# Altium PCB FMC-320U-A2.PcbDoc
Units mm, origin at the board's own origin, x right, y up, seen from the top; angles counter-clockwise.
Board outline 96 x 84 mm, 2 copper layers (Top Layer, Bottom Layer), stack 1.672 mm thick; 84 components, 64 nets, 252 pads, 61 vias.
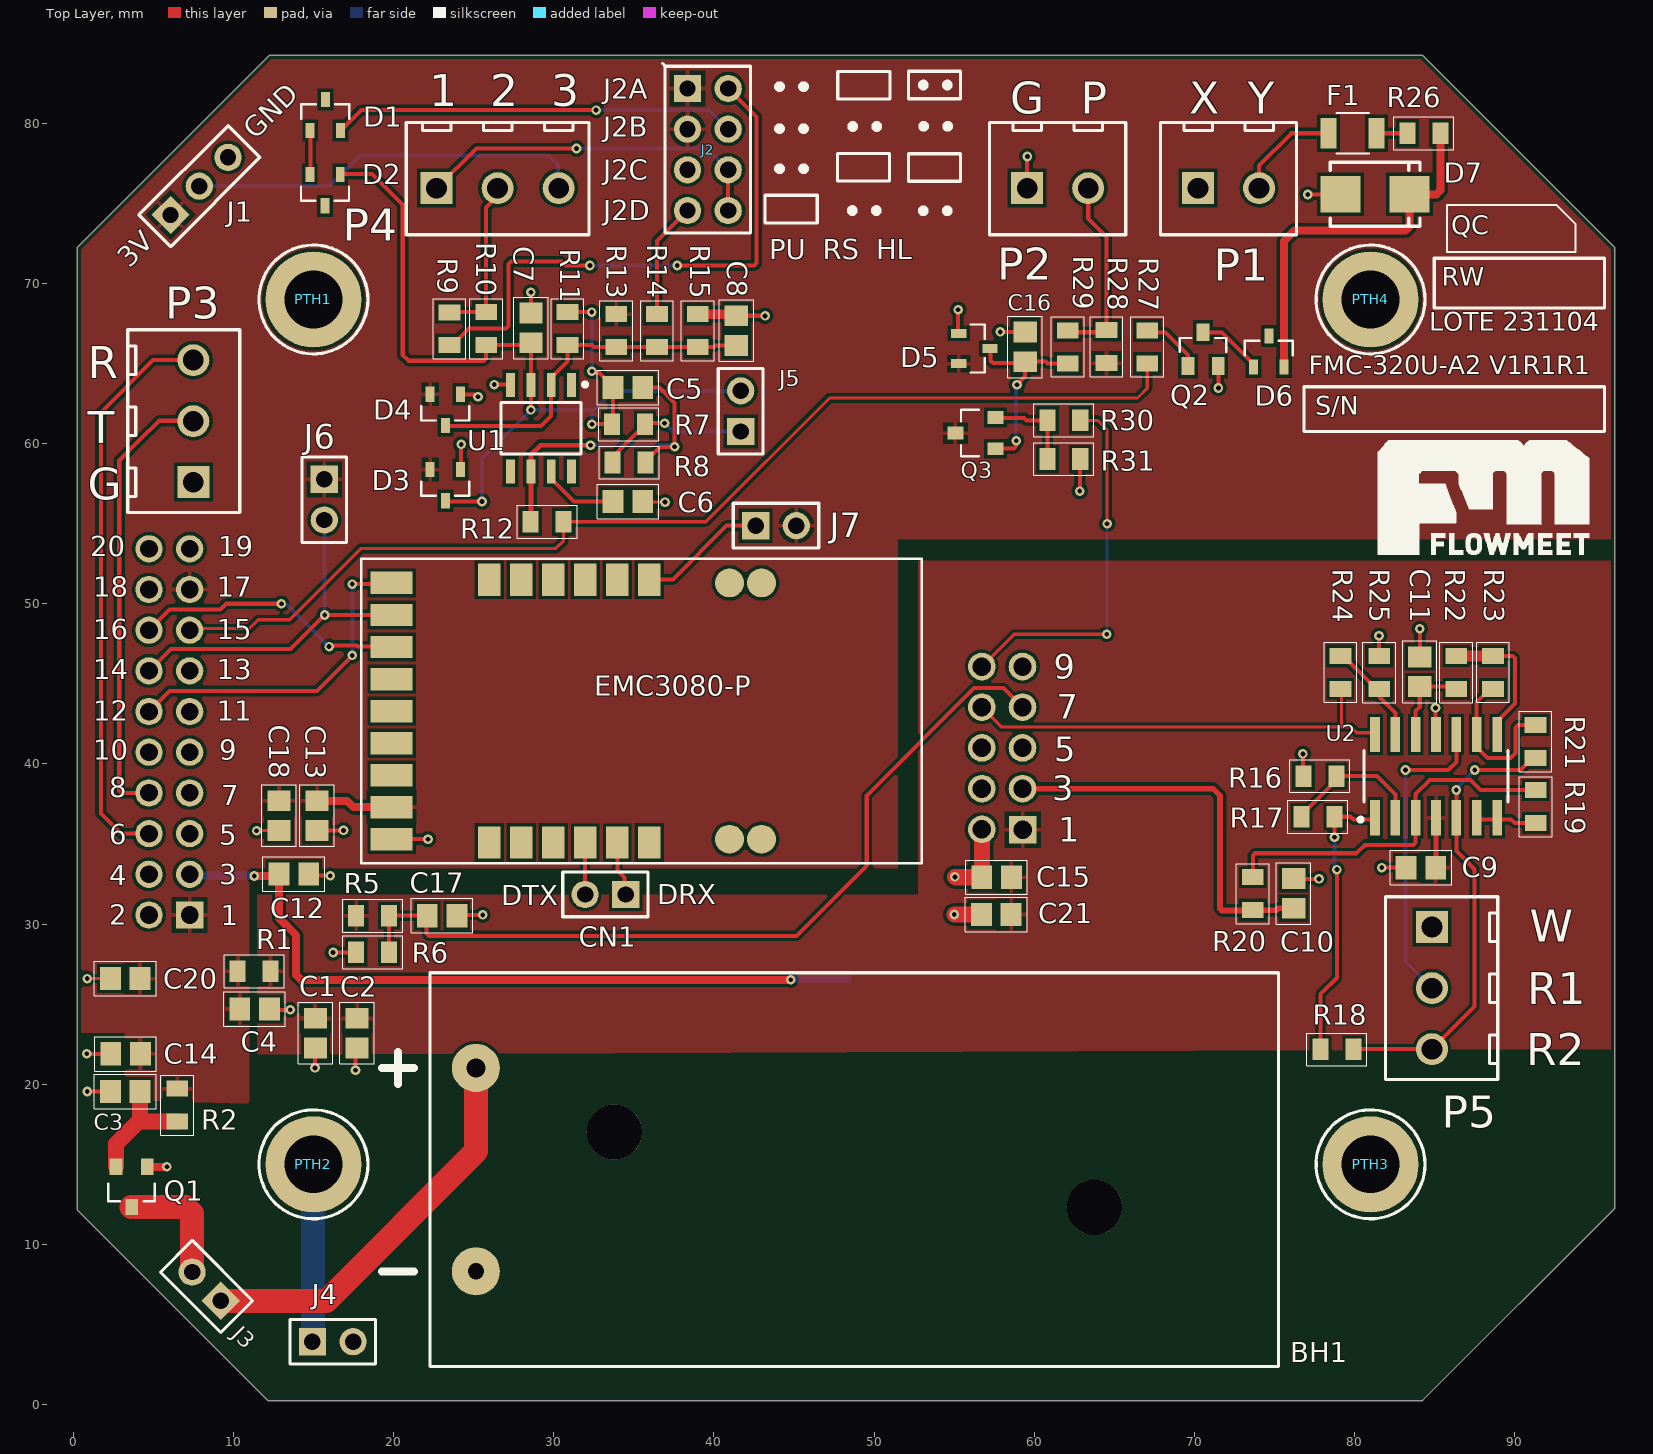
[diagram p0: Top Layer view]
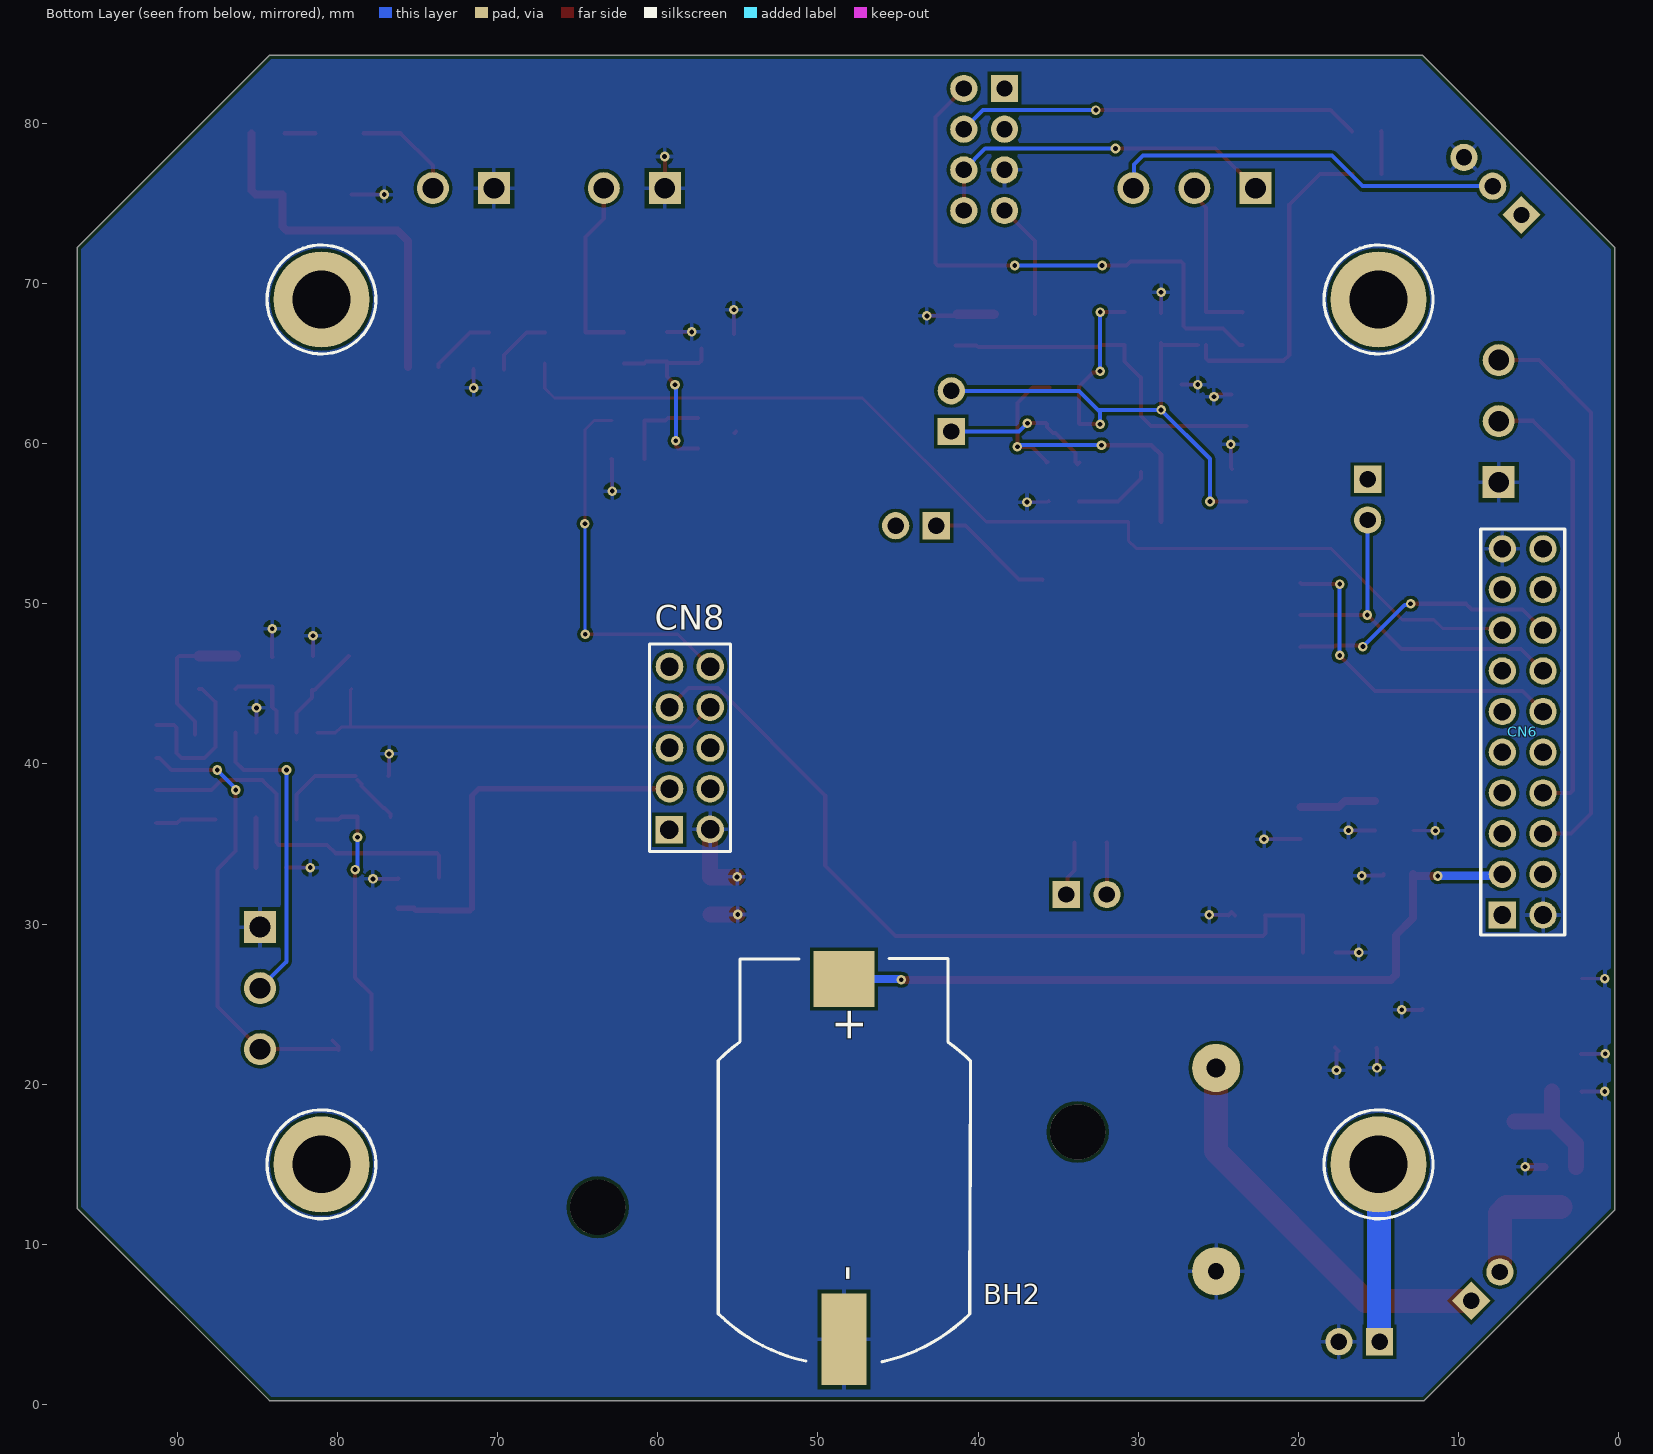
[diagram p1: Bottom Layer view, seen from below]
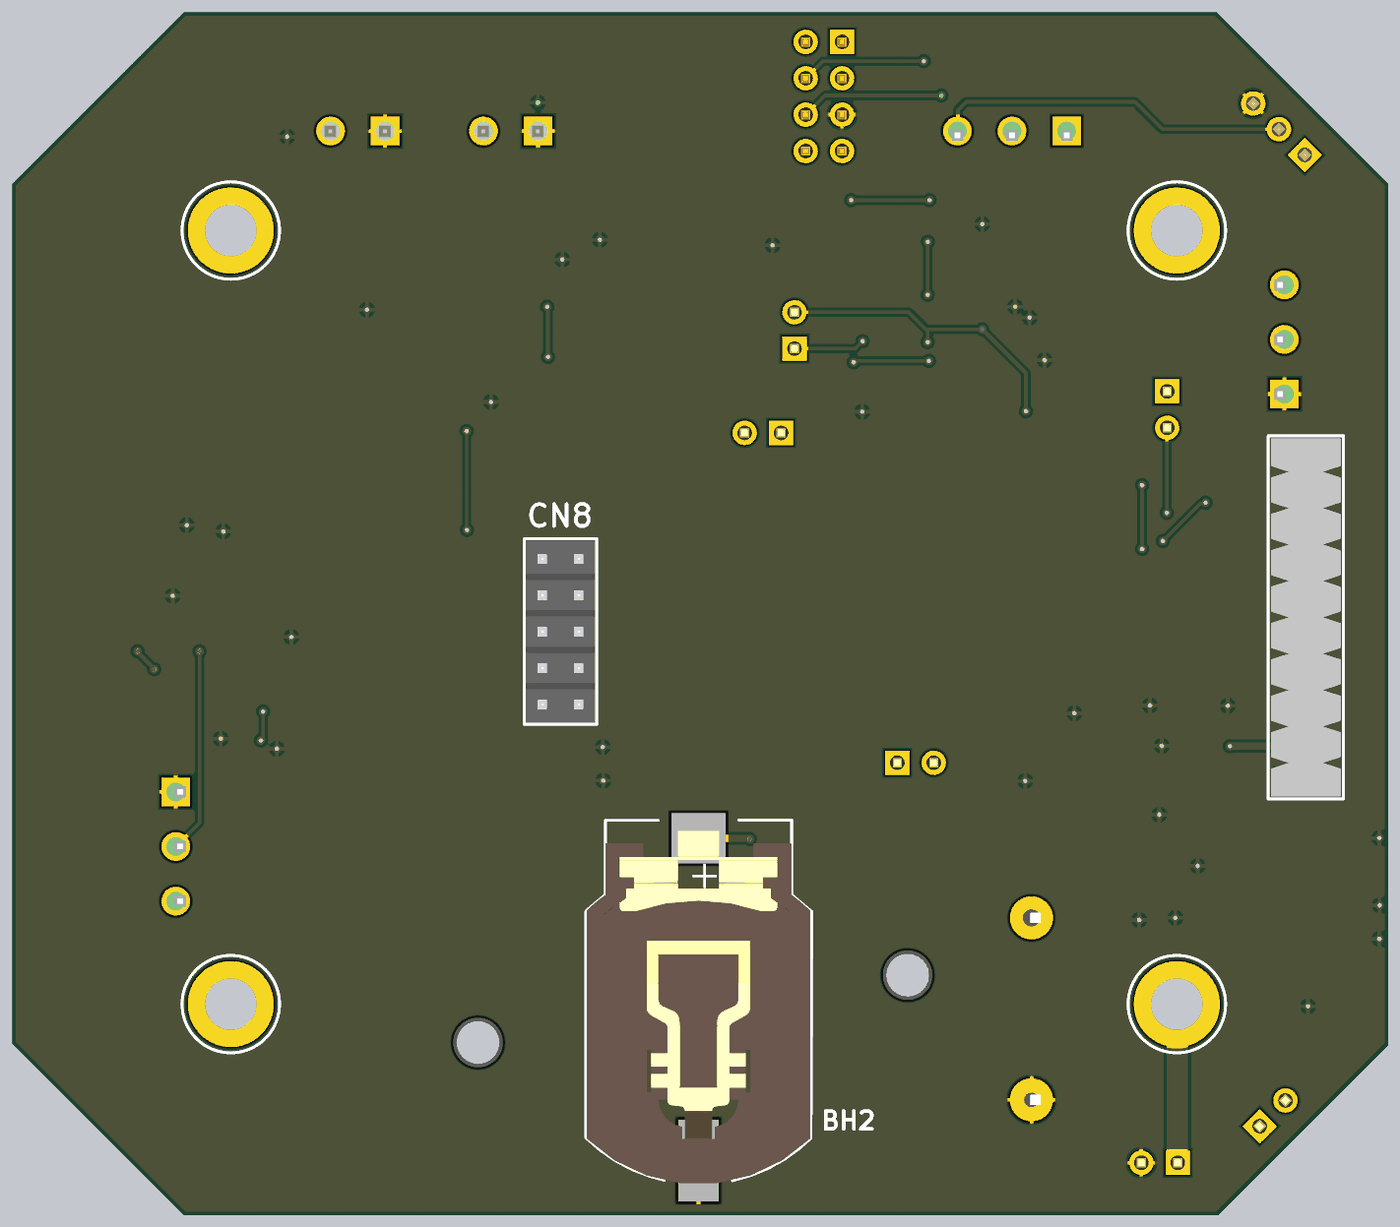
[diagram p2: 3D render of the assembled board from below, using the file's embedded part models]

## Layer stack, top to bottom
Top Solder: solder mask 0.1, Solder Resist, Dk 3.5
Top Layer: signal copper 0.036
Dielectric 1: dielectric 1.6, FR-4, Dk 4.8
Bottom Layer: signal copper 0.036
Bottom Solder: solder mask 0.1, Solder Resist, Dk 3.5

## Board outline
0.25,12.15 0.25,72.25 12.25,84.25 84.25,84.25 96.25,72.25 96.25,12.25 84.25,0.25 12.15,0.25

## Design rules (kind name [scope] priority, off if disabled: settings)
BoardOutlineClearance [All] p1: gap=0.25 ignorepadtopadclearanceinfootprint=FALSE
Clearance [All] p1: gap=0.2 ignorepadtopadclearanceinfootprint=FALSE
ComponentClearance [All] p1: gap=0.099 collisioncheckmode=3 verticalgap=0.099 showdistances=FALSE
HoleSize [All] p1: absolutevalues=TRUE maxlimit=10 minlimit=0.3 maxpercent=80.000 minpercent=20.000
MinimumSolderMaskSliver [All] p1: minsoldermaskwidth=0.2
PlaneClearance [All] p1: clearance=0.25
PolygonConnect [All] p1: connectstyle=Relief reliefconductorwidth=0.254 reliefentries=4 polygonreliefangle="90 Angle" airgapwidth=0.254
RoutingVias [All] p1: holewidth=0.3 width=0.6 viastyle="Through Hole" minholewidth=0.3 minwidth=0.6 maxholewidth=0.3 maxwidth=0.6
SilkToSilkClearance [All] p1: silktosilkclearance=0.2
SilkToSolderMaskClearance [IsPad] p1: minsilkscreentomaskgap=0.2 clearancetoexposedcopper=TRUE
SolderMaskExpansion [All] p1: expansion=0.102 istentingtop=FALSE
Width [All] p1: maxlimit=5 minlimit=0.2 preferedwidth=0.2
24 further rules are at their usual default settings.

## Components (designator, comment, footprint, x,y, rotation, side; value= is the part's Value field where it differs from the comment)
BH1 "2468" BATTERY_HOLDER_2XAAA 48.769,14.669 r180 top locked
BH2 "Battery Holder CR2032" BS-08-B2AA016 48.375,13.575 r90 bottom
C1 "4.7uF" CAP_SM0805_YAGEOCC2_N 15.125,23.2 r270 top
C2 "100nF" CAP_SM0805_YAGEOCC2_N 17.725,23.2 r270 top
C3 "4.7uF" CAP_SM0805_YAGEOCC2_N 3.25,19.544 r180 top
C4 "100nF" CAP_SM0805_YAGEOCC2_N 11.323,24.7 r0 top
C5 "33pF" CAP_SM0805_YAGEOCC2_N 34.633,63.5 r0 top
C6 "1uF" CAP_SM0805_YAGEOCC2_N 34.633,56.388 r0 top
C7 "47nF" CAP_SM0805_YAGEOCC2_N 28.575,67.221 r90 top
C8 "47nF" CAP_SM0805_YAGEOCC2_N 41.402,67.056 r90 top
C9 "100nF" CAP_SM0805_YAGEOCC2_N 84.148,33.525 r180 top
C10 "100nF" CAP_SM0805_YAGEOCC2_N 76.2,31.915 r90 top
C11 "10nF" CAP_SM0805_YAGEOCC2_N 84.074,45.758 r90 top
C12 "100nF" CAP_SM0805_YAGEOCC2_N 13.775,33.125 r0 top
C13 "100nF" CAP_SM0805_YAGEOCC2_N 15.225,36.773 r270 top
C14 "100nF" CAP_SM0805_YAGEOCC2_N 3.275,21.9 r180 top
C15 "100nF" CAP_SM0805_YAGEOCC2_N 57.65,32.925 r180 top
C16 "100nF" CAP_SM0805_YAGEOCC2_N 59.436,66.04 r90 top
C17 "4.7uF" CAP_SM0805_YAGEOCC2_N 23.027,30.525 r0 top
C18 "4.7uF" CAP_SM0805_YAGEOCC2_N 12.85,36.773 r270 top
C20 "4.7uF" CAP_SM0805_YAGEOCC2_N 3.25,26.6 r180 top
C21 "4.7uF" CAP_SM0805_YAGEOCC2_N 57.627,30.6 r180 top
CN1 "Usar Equivalente" "HEADER PIN 1X2" 33.23,31.85 r180 top
CN6 "DZ254R-22-20-63" "HEADER PIN 2X10" 6,42 r90 bottom
CN8 "Uar Equivalente" "HEADER PIN 2X5 MIRROR" 58,41 r270 bottom
D1 "BAV23S" BAV23S 15.748,80.518 r90 top
D2 "BAV23S" BAV23S 15.723,75.819 r270 top
D3 "BAV23S" BAV23S 23.241,57.404 r270 top
D4 "BAV23S" BAV23S 23.241,62.103 r270 top
D5 "BAV23S" BAV23S 56.261,65.938 r0 top
D6 "BAV23S" BAV23S 74.65,65.75 r90 top
D7 "SMBJ28CA-13-F" SMBJ28CA-13-F 81.28,75.565 r0 top value="24V - 26.7V - 38.9V"
EMC3080-P "EMC3080-P" EMC3080-P 31.425,43.3 r270 top
F1 "0ZCJ0005FF2E" 0ZCJ0005FF2E 79.883,79.375 r0 top
J1 "" "HEADER PIN 1X3" 7.874,76.073 r45 top
J2 "Usar equivalente" "HEADER PIN 2X4" 39.624,78.359 r270 top
J3 "Usar Equivalente" "HEADER PIN 1X2" 8.323,7.377 r135 top
J4 "Usar Equivalene" "HEADER PIN 1X2" 16.205,3.925 r0 top
J5 "Usar Equivalente" "HEADER PIN 1X2" 41.675,62.025 r90 top
J6 "Usar Equivalente" "HEADER PIN 1X2" 15.675,56.5 r270 top
J7 "Usar Equivalente" "HEADER PIN 1X2" 43.88,54.875 r0 top
P1 "WJ15EDGVC-3.81-2P" "HEADER PLUG 2" 72.136,75.946 r0 top
P2 "WJ15EDGVC-3.81-2P" "HEADER PLUG 2" 61.468,75.946 r0 top
P3 "WJ15EDGVC-3.81-3P" "HEADER PLUG 3" 7.5,61.4 r90 top
P4 "WJ15EDGVC-3.81-3P" "HEADER PLUG 3" 26.5,75.946 r0 top
P5 "WJ15EDGVC-3.81-3P" "HEADER PLUG 3" 84.836,26 r270 top
PTH1 "PTH-3MM-M" PTH_M3_M 15,69 r0 top locked
PTH2 "PTH-3MM-M" PTH_M3_M 15,15 r0 top
PTH3 "PTH-3MM-M" PTH_M3_M 81,15 r0 top locked
PTH4 "PTH-3MM-M" PTH_M3_M 81,69 r0 top
Q1 "DMG3401LSN-7" DMG3401LSN-7 3.65,13.45 r270 top
Q2 "DMG3402L-7" DMG3402L-7 70.546,65.843 r90 top
Q3 "DMG3401LSN-7" DMG3401LSN-7 56.183,60.657 r180 top
R1 "10R" RES_SM0805_YAGEORC_N 11.298,27.05 r0 top
R2 "0" RES_SM0805_YAGEORC_N 6.5,18.7 r90 top
R5 "1M" RES_SM0805_YAGEORC_N 18.698,30.525 r180 top
R6 "1M" RES_SM0805_YAGEORC_N 18.698,28.239 r0 top
R7 "1M" RES_SM0805_YAGEORC_N 34.682,61.214 r0 top
R8 "1M" RES_SM0805_YAGEORC_N 34.704,58.819 r0 top
R9 "100K" RES_SM0805_YAGEORC_N 23.495,67.172 r270 top
R10 "10K" RES_SM0805_YAGEORC_N 25.781,67.183 r270 top
R11 "220K" RES_SM0805_YAGEORC_N 30.861,67.183 r90 top
R12 "1K" RES_SM0805_YAGEORC_N 29.591,55.118 r0 top
R13 "1M" RES_SM0805_YAGEORC_N 33.909,67.056 r90 top
R14 "10K" RES_SM0805_YAGEORC_N 36.449,67.056 r270 top
R15 "1M" RES_SM0805_YAGEORC_N 38.989,67.056 r270 top
R16 "200k" RES_SM0805_YAGEORC_N 77.84,39.243 r0 top
R17 "100K" RES_SM0805_YAGEORC_N 77.713,36.703 r0 top
R18 "2.49K" RES_SM0805_YAGEORC_N 78.9,22.175 r180 top
R19 "100K" RES_SM0805_YAGEORC_N 91.313,37.338 r90 top
R20 "100K" RES_SM0805_YAGEORC_N 73.65,31.9 r270 top
R21 "100K" RES_SM0805_YAGEORC_N 91.3,41.4 r270 top
R22 "1K" RES_SM0805_YAGEORC_N 86.36,45.709 r270 top
R23 "100K" RES_SM0805_YAGEORC_N 88.646,45.72 r90 top
R24 "82K" RES_SM0805_YAGEORC_N 79.121,45.72 r270 top
R25 "10K" RES_SM0805_YAGEORC_N 81.534,45.709 r270 top
R26 "47R" RES_SM0805_YAGEORC_N 84.328,79.375 r180 top
R27 "10K" RES_SM0805_YAGEORC_N 67.056,66.04 r90 top
R28 "1M" RES_SM0805_YAGEORC_N 64.516,66.051 r270 top
R29 "100K" RES_SM0805_YAGEORC_N 62.103,66.04 r270 top
R30 "1K" RES_SM0805_YAGEORC_N 61.848,61.45 r0 top
R31 "1M" RES_SM0805_YAGEORC_N 61.848,59.037 r180 top
U1 "MCP6541" MCP6541-E/SN 29.21,60.96 r270 top
U2 "GS8044" GS8044-SR 85.09,39.243 r90 top

## Footprints (in the part's own frame and the unit in brackets; to place one, negate y for a bottom-side part, rotate by r counter-clockwise, add the part's x,y. Pads: shape width x height; smd on the part's side, far side on the other; paste and mask are expansions set on the pad)
0ZCJ0005FF2E [mm]
  rect 1x1.9 smd: 1(-1.5,0) 2(1.5,0)
  silkscreen extent -1.02,-1.27 1.02,1.27, body extent -1.7,-0.85 1.7,0.85, height 0.51
BATTERY_HOLDER_2XAAA [mm]
  round 3.45 hole 3.45 unplated mask+0.15: 3(-14.985,2.35) 4(14.985,-2.35)
  round 3 hole 1.02 mask+0.15: NEG(23.625,6.35)
  round 3 hole 1.2 mask+0.15: POS(23.625,-6.35)
  silkscreen extent -26.49,-12.29 29.5,12.29, body extent -26.49,-12.3 26.49,12.3, height 13
BAV23S [mm]
  rect 0.95x0.56 smd: 1(-0.975,0.95) 2(-0.975,-0.95) 3(0.975,0)
  silkscreen extent -0.23,-1.5 0.66,1.5, body extent -1.2,-1.46 1.2,1.46, height 1.2
BS-08-B2AA016 [mm]
  rect 5.7x2.8 smd mask+0.2: NEG(-9.5,0)
  rect 3.5x3.8 smd mask+0.2: POS(13,0)
  silkscreen extent -10.9,-7.9 14.28,7.85, body extent -11.15,-7.8 13.5,7.8, height 5.4
CAP_SM0805_YAGEOCC2_N [mm] "Capacitor, Yageo CC Class2, SM0805, IPC Medium Density"
  rect 1.3x1.45 smd: 1(-0.927,0) 2(0.927,0)
  silkscreen extent -1.92,-1.07 1.92,1.07, body extent -1.1,-0.72 1.1,0.72, height 1.45
DMG3401LSN-7 [mm]
  rect 1x0.8 smd: D(1.1,0) G(-1.4,0.975) S(-1.4,-0.975)
  silkscreen extent -0.35,-1.45 0.75,1.45, body extent -1.67,-1.55 1.33,1.55, height 1.45
DMG3402L-7 [mm]
  rect 1.1x0.8 smd: D(1.1,0) G(-1,0.95) S(-1,-0.95)
  silkscreen extent -0.13,-1.45 0.75,1.45, body extent -1.45,-1.55 1.55,1.55, height 1.45
EMC3080-P [mm]
  round 1.8 smd mask+0.15: 1(-8,11.55) 2(-8,9.55) 24(8,9.55) 25(8,11.55)
  rect 2x1.4 smd mask+0.15: 3(-8.2,4.55) 4(-8.2,2.55) 5(-8.2,0.55) 6(-8.2,-1.45) 7(-8.2,-3.45) 8(-8.2,-5.45) 18(8.2,-5.45) 19(8.2,-3.45) 20(8.2,-1.45) 21(8.2,0.55) 22(8.2,2.55) 23(8.2,4.55)
  rect 1.4x2.6 smd mask+0.15: 9(-8,-11.55) 10(-6,-11.55) 11(-4,-11.55) 12(-2,-11.55) 13(0,-11.55) 14(2,-11.55) 15(4,-11.55) 16(6,-11.55) 17(8,-11.55)
  silkscreen extent -9.5,-13.45 9.5,21.55
GS8044-SR [mm]
  rect 2.2x0.6 smd: 1(-2.6,3.81) 2(-2.6,2.54) 3(-2.6,1.27) 4(-2.6,0) 5(-2.6,-1.27) 6(-2.6,-2.54) 7(-2.6,-3.81) 8(2.6,-3.81) 9(2.6,-2.54) 10(2.6,-1.27) 11(2.6,0) 12(2.6,1.27) 13(2.6,2.54) 14(2.6,3.81)
  silkscreen extent -2.85,-4.5 1.6,4.83, body extent -3,-4.32 3,4.32, height 1.75
"HEADER PIN 1X2" [mm]
  rect 1.7x1.7 hole 1.02: 1(-1.27,0)
  round 1.7 hole 1.02: 2(1.27,0)
  silkscreen extent -2.67,-1.4 2.67,1.4, body extent -2.54,-1.27 2.54,1.27, height 8.49
"HEADER PIN 1X3" [mm]
  rect 1.7x1.7 hole 1.02: 1(-2.54,0)
  round 1.7 hole 1.02: 2(0,0) 3(2.54,0)
  silkscreen extent -3.94,-1.4 3.94,1.4, body extent -3.81,-1.27 3.81,1.27, height 8.57
"HEADER PIN 2X4" [mm]
  rect 1.7x1.7 hole 1.02: 1(-3.81,-1.27)
  round 1.7 hole 1.02: 2(-3.81,1.27) 3(-1.27,-1.27) 4(-1.27,1.27) 5(1.27,-1.27) 6(1.27,1.27) 7(3.81,-1.27) 8(3.81,1.27)
  silkscreen extent -5.38,-2.83 5.21,2.67, body extent -5.08,-2.54 5.08,2.54, height 8.89
"HEADER PIN 2X5 MIRROR" [mm]
  rect 1.725x1.725 hole 1.15: 1(5.105,-1.28)
  round 1.725 hole 1.15: 2(5.08,1.27) 3(2.54,-1.27) 4(2.54,1.27) 5(0,-1.27) 6(0,1.27) 7(-2.54,-1.27) 8(-2.54,1.27) 9(-5.08,-1.27) 10(-5.08,1.27)
  silkscreen extent -6.48,-2.52 6.47,2.53, body extent -6.35,-2.41 6.35,2.41, height 8.58
"HEADER PIN 2X10" [mm]
  rect 1.7x1.7 hole 1.1: 1(-11.43,1.27)
  round 1.7 hole 1.1: 2(-11.43,-1.27) 3(-8.89,1.27) 4(-8.89,-1.27) 5(-6.35,1.27) 6(-6.35,-1.27) 7(-3.81,1.27) 8(-3.81,-1.27) 9(-1.27,1.27) 10(-1.27,-1.27) 11(1.27,1.27) 12(1.27,-1.27) 13(3.81,1.27) 14(3.81,-1.27) 15(6.35,1.27) 16(6.35,-1.27) 17(8.89,1.27) 18(8.89,-1.27) 19(11.43,1.27) 20(11.43,-1.27)
  silkscreen extent -12.67,-2.63 12.67,2.63, body extent -12.5,-2.44 12.5,2.44, height 8.24
"HEADER PLUG 2" [mm] "Connector; Header; 2 Position"
  rect 2x2 hole 1.3 mask+0.15: 1(-1.905,0)
  round 2 hole 1.3 mask+0.15: 2(1.905,0)
  silkscreen extent -4.25,-2.9 4.25,4.1, body extent -4.48,-3.03 4.52,4.23, height 9.22
"HEADER PLUG 3" [mm] "Connector; Header; 3 Position"
  rect 2x2 hole 1.3 mask+0.15: 1(-3.81,0)
  round 2 hole 1.3 mask+0.15: 2(0,0) 3(3.81,0)
  silkscreen extent -5.71,-2.9 5.71,4.1, body extent -6.32,-3.1 6.3,4.1, height 3
MCP6541-E/SN [mm]
  rect 1.5x0.55 smd: 1(-2.7,1.905) 2(-2.7,0.635) 3(-2.7,-0.635) 4(-2.7,-1.905) 5(2.7,-1.905) 6(2.7,-0.635) 7(2.7,0.635) 8(2.7,1.905)
  silkscreen extent -2.85,-2.5 1.6,2.88, body extent -3,-2.45 3,2.45, height 1.75
PTH_M3_M [mm]
  round 6 hole 3.6: 1(0,0)
  silkscreen extent -3.4,-3.4 3.4,3.4
RES_SM0805_YAGEORC_N [mm] "Resistor, Yageo RC_L, SM0805, IPC Medium Density"
  rect 1x1.35 smd: 1(-1.027,0) 2(1.027,0)
  silkscreen extent -1.88,-1.02 1.88,1.02, body extent -1.05,-0.67 1.05,0.67, height 0.6
SMBJ28CA-13-F [mm]
  rect 2.5x2.3 smd: A(-2.15,0) K(2.15,0)
  silkscreen extent -2.8,-2 2.8,2, body extent -2.8,-1.98 2.8,1.97, height 2.65

## Part data
BH1: "2 x AAA through hole economic type", Manufacturer="Keystone Electronics", Manufacturer Part Number=2462, Category="Battery holder", ComponentLink1Description=datasheet, ComponentLink1URL=https://www.keyelco.com/userAssets/file/M65p28.pdf
BH2: library part BS-08-B2AA016, "Battery base -25℃~+85℃ CR2032 SMD Battery Connectors ROHS", Manufacturer=Myoung, Category="Battery holder", Datasheet=https://datasheet.lcsc.com/lcsc/2012181809_MYOUNG-BS-08-B2AA016_C964792.pdf, Manufacturer Part Number=BS-08-B2AA016
C1 C3 C17 C18 C20 C21: library part CC0805KRX5R6BB475, "CAP 4.7uF SM0805 X5R 10V YAGEO CC2", Manufacturer=Yageo, Package=0805, Supplier Part Number 1=718671, Tolerance (%)=10, Category=Capacitor, ComponentLink1Description="Manufacturer Website", ComponentLink1URL=http://www.yageo.com, Datasheet=https://datasheet.lcsc.com/lcsc/2304140030_YAGEO-CC0805KRX5R6BB475_C605218.pdf, Manufacturer Part Number=CC0805KRX5R6BB475, Supplier 1=Farnell, Supplier 2=Digi-Key, Supplier Part Number 2=311-1374-1-ND, Voltage Rating (Volts)=10
C2 C4 C9 C10 C12 C13 C14 C15 C16: library part CC0805KRX7R8BB104, "CAP 100nF SM0805 X7R 25V YAGEO CC2", Manufacturer=Yageo, Package=0805, Supplier Part Number 1=644249, Tolerance (%)=10, Voltage Rating (Volts)=25, Category=Capacitor, ComponentLink1Description="Manufacturer Website", ComponentLink1URL=http://www.yageo.com, Manufacturer Part Number=CC0805KRX7R8BB104, Supplier 1=Farnell, Supplier 2=Digi-Key, Supplier Part Number 2=311-1141-1-ND
C5: library part CC0805JRNPO9BN330, "CAP 33pF SM0805 NPO 50V YAGEO CC2", Manufacturer=Yageo, Package=0805, Supplier Part Number 1=1362559, Tolerance (%)=5, Voltage Rating (Volts)=50, Category=Capacitor, ComponentLink1Description="Manufacturer Website", ComponentLink1URL=http://www.yageo.com, Manufacturer Part Number=CC0805JRNPO9BN330, Supplier 1=Farnell, Supplier 2=Digi-Key, Supplier Part Number 2=311-1105-1-ND
C6: library part CC0805KKX7R8BB105, "CAP 1uF SM0805 X7R 25V YAGEO CC2", Manufacturer=Yageo, Package=0805, Supplier Part Number 1=1458903, Tolerance (%)=10, Voltage Rating (Volts)=25, Category=Capacitor, ComponentLink1Description="Manufacturer Website", ComponentLink1URL=http://www.yageo.com, Manufacturer Part Number=CC0805KKX7R8BB105, Supplier 1=Farnell, Supplier 2=Digi-Key, Supplier Part Number 2=311-1456-1-ND
C7 C8: library part CC0805KRX7R8BB473, "CAP 47nF SM0805 X7R 25V YAGEO CC2", Manufacturer=Yageo, Package=0805, Supplier Part Number 1=644201, Tolerance (%)=10, Voltage Rating (Volts)=25, Category=Capacitor, ComponentLink1Description="Manufacturer Website", ComponentLink1URL=http://www.yageo.com, Manufacturer Part Number=CC0805KRX7R8BB473, Supplier 1=Farnell, Supplier 2=Digi-Key
C11: library part CC0805KRX7R8BB103, "CAP 10nF SM0805 X7R 25V YAGEO CC2", Manufacturer=Yageo, Package=0805, Supplier Part Number 1=3019767, Tolerance (%)=10, Voltage Rating (Volts)=25, Category=Capacitor, ComponentLink1Description="Manufacturer Website", ComponentLink1URL=http://www.yageo.com, Manufacturer Part Number=CC0805KRX7R8BB103, Supplier 1=Farnell
CN1 J3 J4 J5 J6 J7: library part 54101-T0602LF, "1 x 2 - true hole  2.54mm - Pb free", Manufacturer="Amphenol ICC", Category="Header pin", Datasheet=https://datasheet.lcsc.com/lcsc/2202082130_Amphenol-ICC-54101-T06-00_C213463.pdf, Equivalente=B-2100S02P-A110, Manufacturer Part Number=54101-T0602LF
CN6: "2 x 10 - true hole 2.54mm", Manufacturer=DEALON, Category="Header pin", ComponentLink1Description=Datasheet, ComponentLink1URL=https://datasheet.lcsc.com/lcsc/2201121730_DEALON-DZ254R-22-20-63_C2935926.pdf, Manufacturer Part Number=DZ254R-22-20-63
CN8: library part DZ254R-22-10-63, "2 x 5 - true hole 2.54mm", Manufacturer=DEALON, Category="Header pin", Datasheet=https://datasheet.lcsc.com/lcsc/2201121730_DEALON-DZ254R-22-10-63_C2935920.pdf, Equivalente=PZ254V-12-10P, Manufacturer Part Number=DZ254R-22-10-63
D1 D2 D3 D4 D5 D6: "DIODE ARRAY GP 250V 200MA SOT23", Manufacturer=onsemi, Category=Diodo, Datasheet=https://www.onsemi.com/pdf/datasheet/bav23s-d.pdf, Manufacturer Part Number=BAV23S
D7: Manufacturer="Diodes Incorporated", Manufacturer Part Number=SMBJ24CA, Category=Diodo, ComponentLink1Description=datasheet, ComponentLink1URL=https://datasheet.lcsc.com/lcsc/2304140030_Diodes-Incorporated-SMBJ28CA-13-F_C135064.pdf
EMC3080-P: "Solamente es el zocalo donde va montado el chip, por eso no tiene modelo 3D", Manufacturer=MXCHIP, Category="BLE Module", Datasheet=https://files.seeedstudio.com/products/113990975/EMC3080EN.pdf, Manufacturer Part Number=EMC3080-P
F1: "PTC RESET FUSE 60V 50MA 1206", Manufacturer="Bel Fuse Inc.", Category=Fusible, ComponentLink1Description=datasheet, ComponentLink1URL=https://www.belfuse.com/resources/datasheets/circuitprotection/ds-cp-0zcj-series.pdf, Manufacturer Part Number=0ZCJ0005FF2E
J1: library part 54101-T0600LF-03, "1 x 3 - Cuttable - true hole  2.54mm - Pb free", Manufacturer="Amphenol ICC", Manufacturer Part Number=54101-T06-00, Package=2.54mm, ComponentLink1Description=Datasheet, ComponentLink1URL=https://datasheet.lcsc.com/lcsc/2202082130_Amphenol-ICC-54101-T06-00_C213463.pdf, Type=Thru-hole
J2: library part 54102-T0604LF-JUMPER, "2 x 4  - true hole  2.54mm", Manufacturer="Amphenol ICC", Manufacturer PartNumber=54102-T0604LF, Category="Header pin", Datasheet="New link", Equivalente=PZ254V-12-8P
P1 P2: "TERM BLOK FEMALE 1X2 3.81MM", Manufacturer="Ningbo Kangnex Elec", Category="Bornera enchufable", Datasheet=https://datasheet.lcsc.com/lcsc/1912251633_Ningbo-Kangnex-Elec-WJ15EDGVC-3-81-2P_C8396.pdf, Manufacturer Part Number=WJ15EDGVC-3.81-2P
P3 P4 P5: "TERM BLOK FEMALE 1X3 3.81MM", Manufacturer="Ningbo Kangnex Elec", Category="Bornera enchufable", Datasheet=https://datasheet.lcsc.com/lcsc/1912251632_Ningbo-Kangnex-Elec-WJ15EDGVC-3-81-3P_C8389.pdf, Manufacturer Part Number=WJ15EDGVC-3.81-3P
PTH1 PTH2 PTH3 PTH4: "Agujero de montaje metalizado roscas M3. Drill de tamaño medio."
Q1 Q3: "P-CHANNEL ENHANCEMENT MODE MOSFET / RDS(ON) = 85mΩ @ VGS = -2.5V -> ID -2.7A / V(BR)DDS 30V", Manufacturer="Diodes Incorporated", Category="Transistor mosfet", Datasheet=https://www.digikey.com/es/products/detail/diodes-incorporated/DMG3401LSN-7/3720138?s=N4IgTCBcDaICIFkDiBmALABgIwBkDKAcgLQDsIAugL5A, Manufacturer Part Number=DMG3401LSN-7
Q2: "N-CHANNEL ENHANCEMENT MODE FIELD EFFECT TRANSISTOR / 85mΩ @ VGS = 2.5V -> ID 2A / V(BR)DDS 30V", Manufacturer="Diodes Incorporated", Category="Transistor mosfet", Datasheet=https://www.diodes.com/assets/Datasheets/DMG3402L.pdf, Manufacturer Part Number=DMG3402L-7
R1: library part RC0805FR-0710RL, "RES 10R SM0805 YAGEO RC_L", Manufacturer=Yageo, Package=0805, Power (Watts)=0.125, Resistance (Ohms)=10, Supplier Part Number 1=9237240, Tolerance (%)=1, Category=Resistor, ComponentLink1Description="Manufacturer Website", ComponentLink1URL=http://www.yageo.com, Manufacturer Part Number=RC0805FR-0710RL, Supplier 1=Farnell, Supplier 2=Digi-Key, Supplier Part Number 2=311-10.0CRCT-ND
R2: library part RC0805JR-070RL, "RES 0 OHMS SM0805 YAGEO RC_L", Manufacturer=Yageo, Manufacturer Part Number=RC0603FR-070RL, Package=0805, Power (Watts)=0.1, Tolerance (%)=1, Category=Resistor, ComponentLink1Description="Manufacturer Website", ComponentLink1URL=http://www.yageo.com, Resistance (Ohms)=0, Supplier=LCSC
R5 R6 R7 R8 R13 R15 R28 R31: library part RC0805FR-071ML, "RES 1M SM0805 YAGEO RC_L", Manufacturer=Yageo, Package=0805, Power (Watts)=0.125, Resistance (Ohms)=1000000, Supplier Part Number 1=9237992, Tolerance (%)=1, Category=Resistor, ComponentLink1Description="Manufacturer Website", ComponentLink1URL=http://www.yageo.com, Manufacturer Part Number=RC0805FR-071ML, Supplier 1=Farnell, Supplier 2=Digi-Key, Supplier Part Number 2=311-1.00MCRCT-ND
R9 R17 R19 R20 R21 R23 R29: library part RC0805FR-07100KL, "RES 100K SM0805 YAGEO RC_L", Manufacturer=Yageo, Package=0805, Power (Watts)=0.125, Resistance (Ohms)=100000, Supplier Part Number 1=9237879, Tolerance (%)=1, Category=Resistor, ComponentLink1Description="Manufacturer Website", ComponentLink1URL=http://www.yageo.com, Manufacturer Part Number=RC0805FR-07100KL, Supplier 1=Farnell, Supplier 2=Digi-Key, Supplier Part Number 2=311-100KCRCT-ND
R10 R14 R25 R27: library part RC0805FR-0710KL, "RES 10K SM0805 YAGEO RC_L", Manufacturer=Yageo, Package=0805, Power (Watts)=0.125, Resistance (Ohms)=10000, Supplier Part Number 1=9237755, Tolerance (%)=1, Category=Resistor, ComponentLink1Description="Manufacturer Website", ComponentLink1URL=http://www.yageo.com, Manufacturer Part Number=RC0805FR-0710KL, Supplier 1=Farnell, Supplier 2=Digi-Key, Supplier Part Number 2=311-10.0KCRCT-ND
R11: library part RC0805FR-07220KL, "RES 220K SM0805 YAGEO RC_L", Manufacturer=Yageo, Package=0805, Power (Watts)=0.125, Resistance (Ohms)=220000, Supplier Part Number 1=9237917, Tolerance (%)=1, Category=Resistor, ComponentLink1Description="Manufacturer Website", ComponentLink1URL=http://www.yageo.com, Manufacturer Part Number=RC0805FR-07220KL, Supplier 1=Farnell, Supplier 2=Digi-Key, Supplier Part Number 2=311-220KCRCT-ND
R12 R22 R30: library part RC0805FR-071KL, "RES 1K SM0805 YAGEO RC_L", Manufacturer=Yageo, Package=0805, Power (Watts)=0.125, Resistance (Ohms)=1000, Supplier Part Number 1=9237496, Tolerance (%)=1, Category=Resistor, ComponentLink1Description="Manufacturer Website", ComponentLink1URL=http://www.yageo.com, Manufacturer Part Number=RC0805FR-071KL, Supplier 1=Farnell, Supplier 2=Digi-Key, Supplier Part Number 2=311-1.00KCRCT-ND
R16: library part RC0805FR-07200KL, "RES 200K SM0805 YAGEO RC_L", Manufacturer=Yageo, Package=0805, Power (Watts)=0.1, Resistance (Ohms)=200000, Tolerance (%)=1, Category=Resistor, ComponentLink1Description="Manufacturer Website", ComponentLink1URL=http://www.yageo.com, Manufacturer Part Number=RC0805FR-07200KL
R18: library part RT0805FRE072K49L, "RES 2K49 SM0805 YAGEO RT_L", Manufacturer=Yageo, Manufacturer Part Number=RC0603FR-072K49L, Package=0805, Power (Watts)=0.1, Resistance (Ohms)=2490, Tolerance (%)=1, Category=Resistor, ComponentLink1Description="Manufacturer Website", ComponentLink1URL=http://www.yageo.com
R24: library part RC0805FR-0782KL, "RES 82K SM0805 YAGEO RC_L", Manufacturer=Yageo, Package=0805, Power (Watts)=0.125, Resistance (Ohms)=82000, Supplier Part Number 1=9237860, Tolerance (%)=1, Category=Resistor, ComponentLink1Description="Manufacturer Website", ComponentLink1URL=http://www.yageo.com, Manufacturer Part Number=RC0805FR-0782KL, Supplier 1=Farnell, Supplier 2=Digi-Key, Supplier Part Number 2=311-82.0KCRCT-ND
R26: library part RC0805FR-0747RL, "RES 47R SM0805 YAGEO RC_L", Manufacturer=Yageo, Package=0805, Power (Watts)=0.125, Resistance (Ohms)=47, Supplier Part Number 1=9237321, Tolerance (%)=1, Category=Resistor, ComponentLink1Description="Manufacturer Website", ComponentLink1URL=http://www.yageo.com, Manufacturer Part Number=RC0805FR-0747RL, Supplier 1=Farnell, Supplier 2=Digi-Key, Supplier Part Number 2=311-47.0CRCT-ND
U1: library part MCP6541-E/SN, "IC COMP PP I/O SNGL 1.6V 8SOIC", Manufacturer="Microchip Tech", Category="Amplificador operacional", Datasheet=https://ww1.microchip.com/downloads/en/DeviceDoc/MCP6541%20Output%20SubMicroamp%20Comparators%2020001696K.pdf, Manufacturer Part Number=MCP6541-E/SN
U2: library part GS8044-SR, "IC OPAMP GP 4 CIRCUIT 14SOIC", Manufacturer=Gainsil, Category="Amplificador operacional", Datasheet=https://datasheet.lcsc.com/lcsc/2206101816_Gainsil-GS8044-SR_C605428.pdf, Manufacturer Part Number=GS8044-SR

## Via types
v1: diameter 0.6, hole 0.3, Top Layer to Bottom Layer, tented both sides, 61 vias

## Nets (pads, with @x,y where several pads share a name; then routed paths per layer and width w, separated by ;. In a path a pad name is that pad's centre, name@x,y a point inside that pad or via, vN(x,y) a via of type N, cw(c..) or ccw(c..) an arc to the next point about the centre after c; other vN are vias at no path point)
ADC_IN3: CN8.6
ADC_IN4: CN8.4
AVDD: C1.1 C2.1 C9.1 C15.1 C21.1 CN8.1 R1.2 R5.2 U2.4 | length 3.1
  Top Layer w0.254: C9.1 C9.1@85.09,33.54
  Top Layer w0.3: C9.1@85.09,33.54 U2.4
BATTERY_LEVEL: C17.1 CN8.7 R5.1 R6.2 | length 52.5
  Top Layer w0.254: R6.2 R5.1 C17.1 22.06,30.485 22.06,29.419 22.209,29.27 45.145,29.27 49.547,33.672 49.547,38.04 56.237,44.729 58.081,44.729 CN8.7
DBG_RX: CN1.1 EMC3080-P.22 | length 3.5
  Top Layer w0.254: EMC3080-P.22 33.975,33.35 34.425,32.9 34.425,31.925 CN1.1
DBG_TX: CN1.2 EMC3080-P.21 | length 3.3
  Top Layer w0.254: CN1.2 31.96,35.085 EMC3080-P.21
DVDD: C4.1 C13.1 C14.1 C18.1 C20.1 CN6.1 CN6.17 D3.2 D4.2 D5.2 EMC3080-P.16 J1.1 J2.1 J2.3 J6.1 J7.2 Q3.D R1.1 R2.2 R13.2 R28.2 | length 4.9
  Top Layer w0.254: Q3.D@55.125,60.743 55.197,60.671 Q3.D@55.183,60.657
  Top Layer w0.5: C13.1 17.1,37.7 17.5,37.3 EMC3080-P.16
FLOW_DETECTOR: CN8.10 R30.2 | length 23.4
  Top Layer w0.2: CN8.10 58.75,48.1 v1(64.525,48.1) ; R30.2 63.95,61.45 64.55,60.85 64.55,55.15 64.475,55.075 v1(64.55,55)
  Bottom Layer w0.2: v1(64.525,48.1) 64.537,48.112 64.537,54.987 v1(64.55,55)
GND: BH1.NEG BH2.NEG C1.2 C2.2 C3.2 C4.2 C6.2 C7.2 C8.2 C9.2 C10.2 C11.2 C12.2 C13.2 C14.2 C15.2 C16.2 C17.2 C18.2 C20.2 C21.2 CN6.2 CN6.19 CN8.2 D3.1 D4.1 D5.1 D7.A EMC3080-P.17 J1.3 J2.5 J4.2 P1.1 P2.1 P3.1 P5.1 Q1.G Q2.S R6.1 R15.1 R16.1 R25.1 R31.1 U1.4 U2.11 | length 56.5
  Top Layer w0.2: v1(0.875,26.6) C20.2 ; v1(11.45,35.825) 11.471,35.846 C18.2 ; C6.2 35.6,56.428 35.678,56.35 v1(36.95,56.35)
  Top Layer w0.254: v1(0.85,21.9) 2.326,21.9 2.337,21.889 C14.2 ; v1(0.875,19.55) 2.279,19.55 2.304,19.525 C3.2 ; C4.2 12.3,24.65 v1(13.55,24.65) 13.744,24.65 v1@13.75,24.644 ; C12.2 14.7,33.123 14.7,33.025 v1(16.05,33.025) ; v1(15.1,21.025) 15.1,22.248 C1.2 ; C13.2 16.871,35.846 v1(16.875,35.85) ; v1(16.225,28.225) 17.657,28.225 R6.1 ; v1(17.627,20.873) 17.627,21.944 17.5,22.071 C2.2@17.725,22.296 ; EMC3080-P.17 v1(22.15,35.3) ; C17.2 24.179,30.75 24.379,30.55 24.404,30.575 v1(25.575,30.575) ; D3.1@24.155,58.42 24.15,58.425 24.225,58.5 v1(24.225,59.95) ; D4.1 25.028,63.078 25.183,62.923 v1(25.277,62.923) ; v1@26.275,63.675 v1(26.285,63.685) U1.4@27.305,63.685 ; C7.2 v1(28.575,69.45) ; C8.2@41.302,68.083 C8.2 43.192,67.983 v1(43.2,67.975) ; D5.1@55.245,66.853 55.25,66.858 v1(55.25,68.36) ; v1(57.875,66.975) 57.883,66.967 C16.2 ; P2.1 59.563,77.913 v1(59.575,77.925) ; v1(62.847,57.033) 62.847,59.009 R31.1 ; Q2.S@71.496,64.643 71.496,63.479 v1(71.5,63.475) ; C10.2 76.208,32.85 76.233,32.825 v1(77.785,32.825) ; v1(76.775,40.627) 76.775,39.281 R16.1 ; v1(77.075,75.55) 77.09,75.565 D7.A ; v1(81.525,48) 81.534,47.991 R25.1 ; v1(81.7,33.525) C9.2 ; C11.2 C11.2 v1(84.075,48.435) ; v1@85.055,43.446 85.055,42.003 U2.11@85.09,41.968
  Top Layer w0.5: Q1.G v1(5.85,14.85)
  Top Layer w0.6: R15.1 C8.2@41.302,68.083
  Top Layer w1: v1(55.013,30.6) C21.2 ; v1(55.05,32.95) 55.075,32.925 C15.2 56.727,32.928 56.727,35.916 CN8.2
  other v1: 85.055,43.5
I2C1_SCL: CN6.5
I2C1_SDA: CN6.4
MXC_ENABLE: CN6.16 EMC3080-P.11 | length 17
  Top Layer w0.254: CN6.16 6.02,49.64 9.182,49.64 9.542,50 v1(13,50) ; v1(15.975,47.325) 16.069,47.325 16.146,47.402 17.685,47.402 17.762,47.325 19.85,47.325 EMC3080-P.11
  Bottom Layer w0.254: v1(13,50) 13.066,49.934 13.366,49.934 v1(15.975,47.325)
MXC_PA13: CN6.14 EMC3080-P.10 J6.2 | length 22.5
  Top Layer w0.254: CN6.14 6.093,47.173 13.573,47.173 v1(15.7,49.3) EMC3080-P.10
  Bottom Layer w0.254: J6.2 15.687,55.217 15.687,49.312 v1(15.7,49.3)
MXC_PA14: CN6.12 EMC3080-P.9 | length 21.1
  Top Layer w0.254: CN6.12 6.02,44.56 15.21,44.56 v1(17.425,46.775) ; v1(17.425,51.225) 19.8,51.225 EMC3080-P.9
  Bottom Layer w0.254: v1(17.425,46.775) v1(17.425,51.225)
NetBH1_POS: BH1.POS J3.1 | length 25
  Top Layer w1.5: J3.1 15.804,6.479 25.144,15.819 BH1.POS
NetC5_1: C5.1 C7.1 D2.1 D3.3 J5.2 R7.1 R10.2 R11.2 U1.3 | length 61.3
  Top Layer w0.254: D2.1@16.637,76.835 18.669,76.835 20.574,74.93 20.574,65.532 20.931,65.175 25.632,65.175 25.781,65.324 R10.2 ; D3.3@23.241,56.388 v1(25.527,56.388) ; R10.2@26.289,66.156 28.437,66.156 C7.1 28.575,63.685 v1(28.575,62.103) ; R11.2 v1(32.374,68.21) ; v1(32.385,61.214) R7.1 33.706,61.265 C5.1 33.706,63.575 32.831,64.45 32.451,64.45 v1(32.385,64.516)
  Bottom Layer w0.254: v1(25.527,56.388) 25.527,59.055 v1(28.575,62.103) 32.385,62.103 32.512,62.103 ; v1(32.374,68.21) 32.385,68.199 v1(32.385,64.516) ; v1(32.385,61.214) 32.385,61.976 32.512,62.103 ; J5.2 33.704,63.295 32.512,62.103
NetC5_2: C5.2 R8.2 R12.1 U1.6 | length 20.9
  Top Layer w0.254: C5.2 36.591,63.5 37.552,62.539 37.552,59.802 v1(37.55,59.8) 36.624,59.8 35.687,58.863 R8.2
  Top Layer w0.3: R12.1 28.575,55.129 28.575,59.296 29.179,59.9 v1(32.3,59.9)
  Bottom Layer w0.254: v1(32.3,59.9) 37.45,59.9 v1(37.55,59.8)
NetC6_1: C6.1 U1.7 | length 4.9
  Top Layer w0.254: U1.7@29.845,58.235 29.845,57.81 31.267,56.388 C6.1
NetC8_1: C8.1 D4.3 R11.1 R13.1 R14.2 R15.2 U1.2 | length 22.4
  Top Layer w0.254: D4.3@23.241,61.087 29.21,61.087 29.845,61.722 29.845,63.685 29.845,64.11 30.861,65.126 R11.1 32.396,66.156 32.523,66.029 R13.1 R14.2 R15.2 39.994,66.029 40.094,66.129 C8.1
NetC11_1: C11.1 R22.2 U2.12 | length 5.3
  Top Layer w0.254: U2.12@83.82,41.968 83.82,43.307 84.074,43.561 C11.1 86.211,44.831 R22.2
NetC16_1: C16.1 D5.3 Q3.G R29.2 | length 12.6
  Top Layer w0.254: D5.3@57.277,65.938 57.277,65.173 57.426,65.024 C16.1@59.309,65.024 ; Q3.G@57.483,59.707 58.726,59.707 58.875,59.856 v1(58.875,60.178) ; v1(58.925,63.675) 59.436,64.186 C16.1@59.436,65.024 ; C16.1@59.328,65.005 C16.1 60.744,65.113 60.844,65.013 R29.2
  Bottom Layer w0.254: v1(58.875,60.178) 58.875,63.625 v1(58.925,63.675)
NetD1_1: D1.1 D2.2 | length 2.7
  Top Layer w0.254: D2.2@14.808,76.835 14.821,76.848 14.821,79.489 D1.1@14.834,79.502
NetD1_2: D1.2 J2.4 | length 25.3
  Top Layer w0.254: D1.2@16.662,79.502 17.985,80.825 v1(32.65,80.825)
  Bottom Layer w0.254: v1(32.65,80.825) 39.698,80.825 J2.4
NetD6_1: D6.1 Q2.D | length 4.2
  Top Layer w0.254: Q2.D 71.727,66.943 73.7,64.97 D6.1
NetD6_2: D6.2 D7.K R26.1 | length 23.7
  Top Layer w0.5: D6.2 75.6,72.65 76.25,73.3 83.175,73.3 83.43,73.555 D7.K 85.115,75.565 85.355,75.805 R26.1
NetEMC3080-P_3: EMC3080-P.3 J7.1 | length 8
  Top Layer w0.254: EMC3080-P.3 36,51.525 37.45,51.525 40.8,54.875 J7.1
NetF1_2: F1.2 R26.2 | length 1.9
  Top Layer w0.254: F1.2 R26.2
NetJ1_2: J1.2 P4.3 | length 24.9
  Bottom Layer w0.254: J1.2 16.007,76.073 17.912,77.978 29.718,77.978 30.275,77.421 P4.3@30.275,75.946
NetJ2_2: J2.2 R9.2 | length 35.4
  Top Layer w0.254: R9.2 23.67,66.145 24.708,67.183 27.029,67.183 27.178,67.332 27.178,71.225 27.327,71.374 30.48,71.374 30.734,71.12 v1(32.258,71.12) ; v1(37.719,71.12) 42.523,71.12 42.672,71.269 42.672,80.391 J2.2
  Bottom Layer w0.254: v1(32.258,71.12) v1(37.719,71.12)
NetJ2_6: J2.6 J2.8 P4.1 | length 22.3
  Top Layer w0.254: P4.1 25.169,78.425 v1(31.425,78.425) ; J2.8 J2.6
  Bottom Layer w0.254: v1(31.425,78.425) 39.558,78.425 J2.6
NetJ2_7: J2.7 R14.1 | length 7.3
  Top Layer w0.254: R14.1 36.449,72.644 J2.7
NetJ3_2: J3.2 Q1.D | length 7.6
  Top Layer w1.5: Q1.D 7.015,12.35 7.425,11.94 J3.2
NetJ4_1: J4.1 PTH2.1 | length 11.1
  Top Layer w1.5: J4.1 J4.1@14.968,3.958 ; PTH2.1@14.968,14.968 PTH2.1
  Bottom Layer w1.5: J4.1@14.968,3.958 PTH2.1@14.968,14.968
NetJ5_1: J5.1 R7.2 R8.1 | length 9.8
  Top Layer w0.254: R8.1 33.721,58.775 33.784,58.712 33.921,58.848 33.921,59.426 35.161,60.666 35.336,60.666 35.709,61.039 R7.2 35.77,61.275 v1(36.925,61.275)
  Bottom Layer w0.254: v1(36.925,61.275) 37.445,60.755 J5.1
NetP2_2: P2.2 R28.1 R29.1 | length 11.9
  Top Layer w0.254: R29.1@62.103,66.94 62.114,66.951 64.516,66.951 R28.1 64.516,72.898 63.373,74.041 P2.2
NetP4_2: P4.2 R9.1 R10.1 | length 10.5
  Top Layer w0.254: R9.1 23.506,68.21 R10.1 25.781,74.727 P4.2@27,75.946
NetP5_2: P5.2 U2.10 | length 19.5
  Top Layer w0.254: v1(83.185,39.624) 85.852,39.624 86.36,40.132 U2.10 U2.10@86.36,41.968
  Bottom Layer w0.254: v1(83.185,39.624) 83.185,27.651 P5.2
NetP5_3: P5.3 R18.1 R21.2 U2.5 | length 29.2
  Top Layer w0.254: R18.1@80.3,22.723 79.927,22.35 R18.1 79.952,22.15 79.992,22.19 P5.3 87.5,24.854 87.5,33.425 86.36,34.565 U2.5 86.355,36.648 86.355,38.37 v1(86.35,38.375) ; v1(87.503,39.624) 90.376,39.624 91.125,40.373 R21.2
  Bottom Layer w0.254: v1(86.35,38.375) 86.35,38.423 87.503,39.576 v1(87.503,39.624)
NetQ2_G: Q2.G R27.2 | length 4
  Top Layer w0.254: R27.2@67.056,66.94 68.188,66.94 69.596,65.532 Q2.G@69.596,64.643
NetQ3_S: Q3.S R30.1 R31.2 | length 5.8
  Top Layer w0.254: Q3.S@57.483,61.607 59.368,61.607 59.525,61.45 R30.1 R31.2
NetR16_2: R16.2 R17.1 U2.2 | length 8.9
  Top Layer w0.254: R17.1 76.686,36.878 77.059,37.251 77.118,37.251 78.494,38.627 78.494,38.743 R16.2@78.74,38.989 ; R16.2 81.407,39.243 82.55,38.1 U2.2@82.55,36.518
NetR17_2: R17.2 R18.2 U2.1 | length 17.6
  Top Layer w0.254: R18.2 77.873,25.623 78.9,26.65 v1(78.9,33.4) ; v1(78.75,35.425) 78.75,36.693 R17.2 79.756,36.703 79.941,36.518 U2.1@81.28,36.518
  Bottom Layer w0.254: v1(78.75,35.425) 78.75,33.55 v1(78.9,33.4)
NetR19_1: R19.1 U2.6 U2.7 | length 3.8
  Top Layer w0.254: U2.6@87.63,36.518 U2.7@88.9,36.518 ; U2.7@88.9,36.543 89.782,36.543 90.014,36.311 R19.1
NetR19_2: R19.2 R20.1 U2.3 | length 23
  Top Layer w0.254: R20.1 73.65,34.276 73.799,34.425 80.125,34.425 80.65,34.95 83.671,34.95 83.82,35.099 U2.3 83.82,38.124 84.698,39.002 87.238,39.002 87.875,38.365 R19.2
NetR21_1: R21.1 R23.1 U2.9 | length 9.9
  Top Layer w0.25: R23.1 88.471,44.693 87.63,43.852 U2.9 87.63,41.043 88.298,40.375 89.75,40.375 90.05,40.675 90.05,42.281 90.196,42.427 R21.1
NetR22_1: R22.1 R23.2 U2.8 | length 8.9
  Top Layer w0.25: R23.2 89.879,46.747 90.025,46.601 90.025,43.768 88.9,42.643 U2.8
  Top Layer w0.7: R22.1 86.365,46.741 R23.2@88.641,46.741
NetR24_1: R24.1 R25.2 U2.13 | length 6.2
  Top Layer w0.254: R24.1@79.296,46.747 80.986,45.057 80.986,45.055 81.421,44.62 81.596,44.62 81.596,44.134 82.55,43.18 U2.13@82.55,41.968
PA0: CN6.10
PB10: CN8.5
PB11: CN8.9
PC8: CN6.20
PC9: CN6.18
PD7: CN6.7
PULSE_BOR: F1.1 P1.2 | length 6.6
  Top Layer w0.254: P1.2 74.025,75.962 74.041,75.978 74.041,77.366 76.05,79.375 F1.1
PULSE_OUT_CMP: CN6.15 R12.2 R27.1 | length 68.3
  Top Layer w0.2: CN6.15 7.374,48.454 11.004,48.454 11.552,49.002 13.523,49.002 17.975,53.454 30.129,53.454 30.618,53.943 R12.2 39.493,55.118 47.225,62.85 66.45,62.85 67.056,63.456 R27.1
RTD_IN: CN8.8 R24.2 U2.14 | length 27.6
  Top Layer w0.2: CN8.8 57.97,42.3 79.186,42.3 ; R24.2 79.186,44.628 79.186,42.3 ; U2.14@81.28,41.943 80.132,41.943 79.775,42.3 79.186,42.3
SPI3_MISO: CN6.11
SPI3_MOSI: CN6.9
SPI3_SCK: CN6.13
USART2_RX: CN6.6 P3.3 | length 35.2
  Top Layer w0.254: CN6.6 2.975,35.65 1.725,36.9 1.725,61.95 4.985,65.21 P3.3@7,65.21
USART2_TX: CN6.8 P3.2 | length 27.7
  Top Layer w0.254: CN6.8 3.024,38.19 2.875,38.339 2.875,58.95 4.15,60.225 5.35,61.425 6.975,61.425 P3.2@7,61.4
VBAT: BH2.POS C12.1 CN6.3 | length 47
  Top Layer w0.5: v1(11.3,33) 12.723,33 C12.1 12.848,30.377 13.925,29.3 13.925,26.818 14.218,26.525 v1(44.8,26.525)
  Bottom Layer w0.5: CN6.3 7.38,33 7.399,33.019 11.281,33.019 v1(11.3,33) ; v1(44.8,26.525) 44.827,26.525 44.877,26.575 BH2.POS
VDD: C3.1 Q1.S R2.1 | length 7.7
  Top Layer w0.25: 2.675,16.273 2.7,16.298
  Top Layer w1: Q1.S 2.675,16.273 ; 2.7,16.298 4.075,17.673 ; C3.1 4.177,17.775 4.075,17.673 ; R2.1 4.075,17.673
VREF+: C10.1 CN8.3 R20.2 | length 24.4
  Top Layer w0.35: CN8.3 59.38,38.35 59.49,38.46 71.165,38.46 71.6,38.025 71.6,30.967 71.717,30.85 73.627,30.85 R20.2 75.125,30.873 75.24,30.988 C10.1
pads on no net: BH1.3 BH1.4 D1.3 D2.3 D6.3 EMC3080-P.1 EMC3080-P.2 EMC3080-P.4 EMC3080-P.5 EMC3080-P.6 EMC3080-P.7 EMC3080-P.8 EMC3080-P.12 EMC3080-P.13 EMC3080-P.14 EMC3080-P.15 EMC3080-P.18 EMC3080-P.19 EMC3080-P.20 EMC3080-P.23 EMC3080-P.24 EMC3080-P.25 PTH1.1 PTH3.1 PTH4.1 U1.1 U1.5 U1.8

## Polygon pours and split planes (outlines as drawn)
AVDD on Top Layer "AVDD_L01_P001" (solid, pour order 1): 11.479,26.059 11.479,31.825 52.759,31.825 52.759,50.8 52.759,52.7 55.884,52.7 96.009,52.7 96.009,22.184 11.479,21.859
DVDD on Top Layer "DVDD_L01_P002" (solid, pour order 2): 0.23,23.206 3.23,23.206 3.23,19.017 10.997,18.773 10.997,33.483 51.49,33.483 51.49,54.033 96.265,54.033 96.24,54.058 96.24,72.233 84.24,84.233 12.24,84.233 0.24,72.233
GND on Bottom Layer "GND_L02_P000" (solid, pour order 0): 12.25,84.25 84.25,84.25 96.25,72.25 96.25,12.25 84.25,0.25 12.15,0.25 0.25,12.15 0.25,72.25

## Silkscreen, mask and mechanical layers (free items; w line width, h text height)
Top Overlay:
  drawing of 59 lines, arcs and shapes, not listed
  text "J2A" at 33.095,81.546 h1.25
  text "1" at 22.218,81.053 h2
  text "2" at 26.028,81.053 h2
  text "3" at 29.838,81.053 h2
  text "G" at 58.5,80.6 h2
  text "P" at 62.9,80.6 h2
  text "X" at 69.675,80.6 h2
  text "Y" at 73.325,80.6 h2
  text "J2B" at 33.095,79.146 h1.25
  text "GND" at 11.375,78.929 h1.25 r45
  text "J2C" at 33.095,76.475 h1.25
  text "J2D" at 33.095,73.95 h1.25
  text "QC" at 86.05,72.65 h2
  text "PU  RS  HL" at 43.45,71.5 h1.25
  text "3V" at 3.5,70.904 h1.25 r45
  text "RW" at 85.45,69.45 h2
  text "LOTE 231104" at 84.675,66.625 h2
  text "R" at 0.9,64.095 h2
  text "FMC-320U-A2 V1R1R1" at 77.15,63.925 h2
  text "S/N" at 77.55,61.4 h2
  text "T" at 0.9,60.011 h2
  text "G" at 0.9,56.5 h2
  text "20" at 1.05,52.975 h1.25
  text "19" at 9.05,52.975 h1.25
  text "18" at 1.25,50.45 h1.25
  text "17" at 8.95,50.45 h1.25
  text "16" at 1.25,47.8 h1.25
  text "15" at 8.95,47.8 h1.25
  text "9" at 61.229,45.304 h1.52
  text "14" at 1.25,45.275 h1.25
  text "13" at 8.95,45.275 h1.25
  text "7" at 61.404,42.829 h1.52
  text "12" at 1.25,42.7 h1.25
  text "11" at 8.95,42.7 h1.25
  text "10" at 1.25,40.275 h1.25
  text "9" at 9.125,40.275 h1.25
  text "5" at 61.254,40.154 h1.52
  text "8" at 2.25,37.925 h1.25
  text "3" at 61.129,37.729 h1.52
  text "7" at 9.25,37.425 h1.25
  text "1" at 61.504,35.154 h1.52
  text "6" at 2.25,35 h1.25
  text "5" at 9.125,34.95 h1.25
  text "3" at 9.125,32.5 h1.25
  text "4" at 2.25,32.425 h1.25
  text "DRX" at 36.45,31.225 h1.25
  text "DTX" at 26.725,31.175 h1.25
  text "2" at 2.25,29.95 h1.25
  text "1" at 9.2,29.925 h1.25
  text "W" at 90.95,28.9 h2
  text "R1" at 90.775,25 h2
  text "R2" at 90.725,21.2 h2
Top Courtyard (Mech15):
  lines w0.01: 0.25,12.15 0.25,72.25 12.25,84.25 84.223,84.25 96.25,72.223 96.25,12.25 84.25,0.25 12.15,0.25 0.25,12.15
  lines w0.508: 117.65,38.605 188.655,38.645 ; 138.65,32.875 138.65,49.875 ; 167.7,32.93 167.7,38.645 ; 188.655,32.875 117.65,32.875 117.65,49.875 ; 188.655,49.875 117.65,49.875 ; 188.76,32.875 188.76,56.875 117.65,56.875 117.65,49.875
  text "FLOWMEET S.R.L." at 134.045,51.406 h5.08
  text "Software" at 140.65,46.903 h2.54
  text "Board ID" at 118.65,46.901 h2.54
  text "Altium Designer v20.2.4" at 142.65,42.591 h3.81
  text "FMC-320U-A2" at 118.63,41.959 h3
  text "Date" at 118.65,36.624 h1.91
  text "File Name" at 140.65,36.624 h1.91
  text "Engineer" at 168.97,36.463 h1.91
  text "4/11/2023" at 120.65,33.903 h2.54
  text "FMC-320U-A2.PcbDoc" at 142.65,33.903 h2.54
  text "DHS" at 170.24,33.593 h2.54
  text "Notes:" at 111.55,25.45 h2.5
  text "1) SMD diodes/LEDs mark is for CATHODE." at 114.854,21.679 h1.52
  text "2) All capacitors are ceramic with no polarity." at 114.704,19.062 h1.52

## Dimensions
0.308,93.877 to 96.308,94.356 on Top Courtyard (Mech15)
84.25,84.25 to 84.25,0.25 on Top Courtyard (Mech15)

## Text inside footprints (layer, text, board x,y; h text height)
BH2: Bottom Overlay "-" at 47.35,7.7 h2 r270; Bottom Overlay "+" at 47.167,22.575 h2 r270